# EAGLE board RFID_MQTT_FINAL_ULTIMO_ULTIMO (EAGLE 7.6.0)
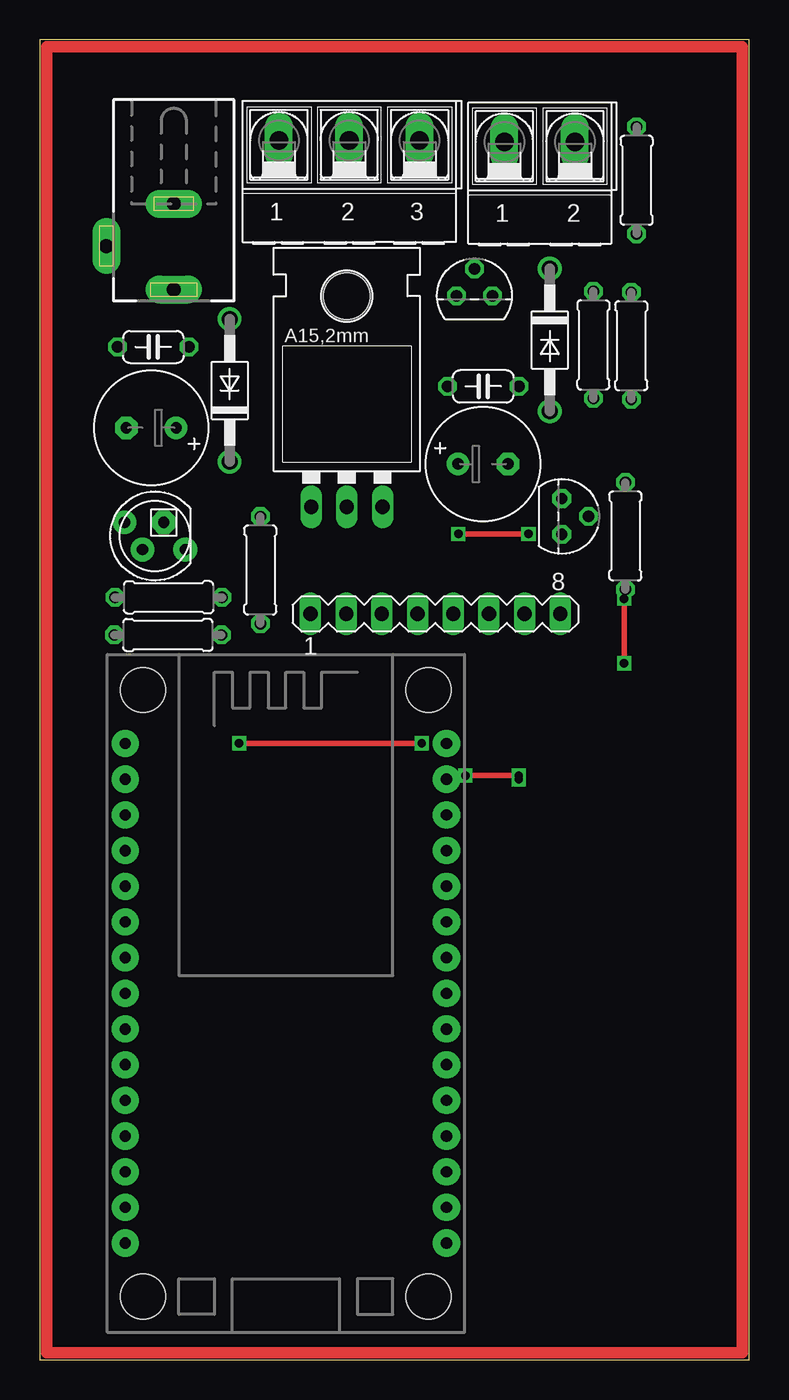
[diagram p0: board, top side]
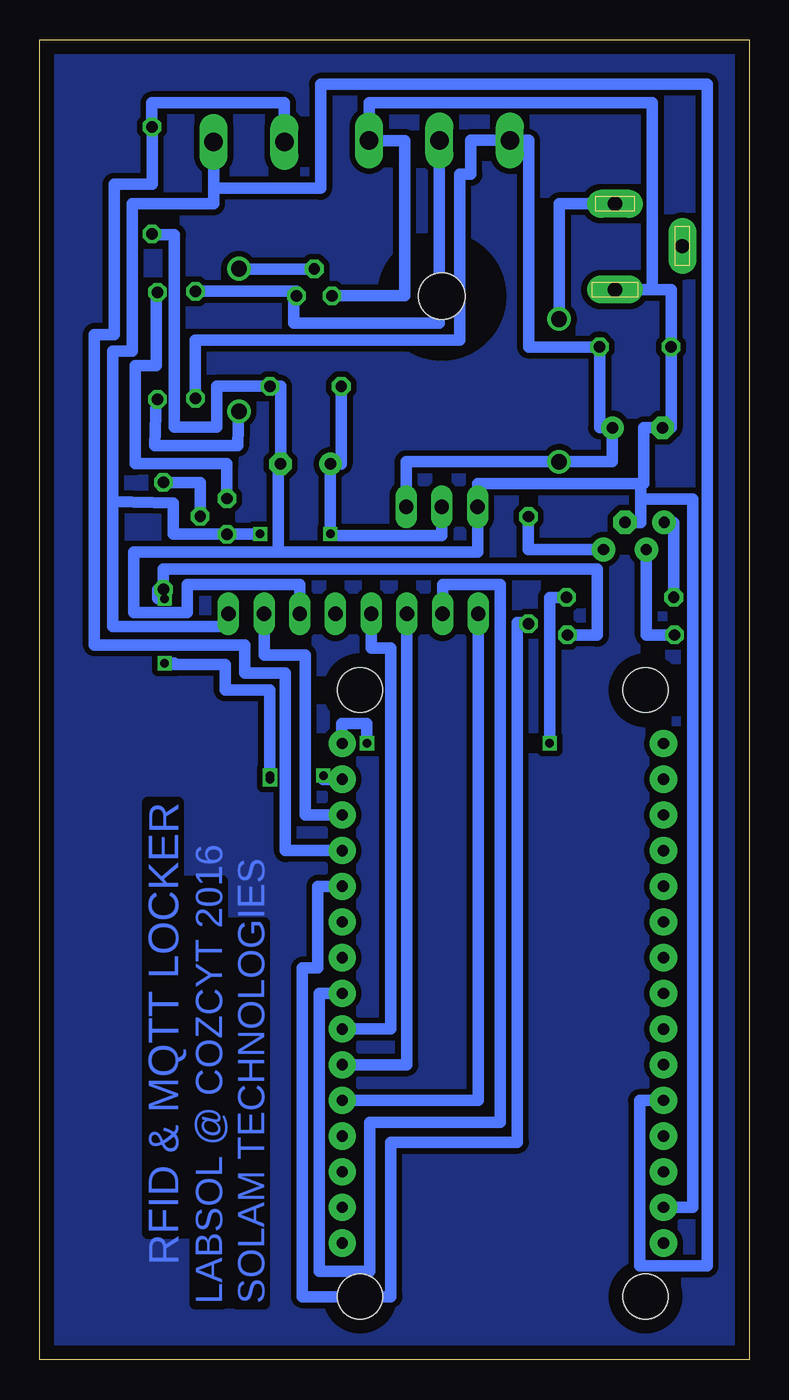
[diagram p1: board, bottom side, seen from below]

Size 50.5 x 94 mm. Coordinates in mm from the lower left corner, seen from the top.
Outline: 0,0 50.5,0 50.5,94 0,94 0,0
Copper layers (1*16): Top 0.035mm / dielectric 1.5mm / Bottom 0.035mm
Design rules "default": minimum track width 10mil, minimum drill 24mil, track to track 8mil, track to pad 8mil, pad to pad 8mil, via to via 8mil, smd to smd 8mil, copper to edge 40mil, drill to drill 8mil, minimum pad ring 10mil, minimum via ring 8mil, stop-mask expansion 4mil, vias tented up to drill 0mil, thermal gap 10mil

## Footprints (pad centres in the part's own frame; a part is rotated, then mirrored left to right if it is on the bottom)
C050-024X044 = drill 0.813 octagon: 1 -2.54,0; 2 2.54,0
E3,5-8 = drill 0.813 pad 1.6: + -1.778,0 | drill 0.813 pad 1.6 octagon: - 1.778,0
DO41-10 = drill 1.118: A 5.08,0; C -5.08,0
DCJ0202 = drill 1 pad 2 long: 1 0,3.1; 2 4.8,0; 3 0,-3
LED5MMRGB = drill 0.8 pad 1.676: 1 -2.159,0.968; 3 0.889,0.968; 4 2.159,-0.968 | drill 0.8 pad 1.676 octagon: 2 -0.635,-0.968
0207/7 = drill 0.813 octagon: 1 -3.81,0; 2 3.81,0
MA08-1 = drill 1.016 long: 1 -8.89,0; 2 -6.35,0; 3 -3.81,0; 4 -1.27,0; 5 1.27,0; 6 3.81,0; 7 6.35,0; 8 8.89,0
TO92 = drill 0.813 octagon: 1 1.27,0; 2 0,1.905; 3 -1.27,0
LD1117V33 = drill 1.016 long: GND -2.54,-8.89; IN 2.54,-8.89; OUT 0,-8.89 | hole 3.302: 0,6.096
ESP12E_DEVKIT = drill 0.8 pad 1.93: 3V3@0 -11.43,-7.62; 3V3@1 11.43,5.08; 3V3@2 11.43,-17.78; AD0 -11.43,17.78; CLK -11.43,-2.54; CMD -11.43,2.54; D0 11.43,17.78; D1 11.43,15.24; D2 11.43,12.7; D3 11.43,10.16; D4 11.43,7.62; D5 11.43,0; D6 11.43,-2.54; D7 11.43,-5.08; D8 11.43,-7.62; EN -11.43,-10.16; GND@0 -11.43,-5.08; GND@1 -11.43,-15.24; GND@2 11.43,2.54; GND@3 11.43,-15.24; RST -11.43,-12.7; RSV@0 -11.43,15.24; RSV@1 -11.43,12.7; RX 11.43,-10.16; SD0 -11.43,0; SD1 -11.43,5.08; SD2 -11.43,7.62; SD3 -11.43,10.16; TX 11.43,-12.7; VIN -11.43,-17.78 | hole 3.2: -10.16,21.59; 10.16,21.59; 10.16,-21.59; -10.16,-21.59
AK500/2-H = drill 1.321 long: 1 -2.515,0; 2 2.515,0
AK500/3-H = drill 1.321 long: 1 -5.004,0; 2 0,0; 3 5.004,0

## Placement (x,y rotation side)
C1  100 nF  [C050-024X044]  8.1,72.11 180 top
C2  100 uF  [E3,5-8]  7.95,66.36 180 top
C3  10 uF  [E3,5-8]  31.56,63.78 0 top
C4  100 nF  [C050-024X044]  31.57,69.31 0 top
D1  1N4004  [DO41-10]  13.53,69.02 90 top
D2  1N4004  [DO41-10]  36.31,72.61 270 top
J1  DCJ0202  [DCJ0202]  9.55,79.3 180 top
LED1  RGBLED_CA-5MM  [LED5MMRGB]  8.21,58.66 180 top
R1  100r  [0207/7]  15.71,56.23 90 top
R2  100r  [0207/7]  9.13,51.61 180 top
R3  100r  [0207/7]  9.18,54.29 180 top
R4  1k  [0207/7]  41.69,58.66 90 top
R5  1k  [0207/7]  42.11,72.2 270 top
R6  1k  [0207/7]  39.41,72.26 270 top
R7  10k  [0207/7]  42.49,83.98 90 top
SV1  [MA08-1]  28.17,53.11 0 top
T1  2N3904  [TO92]  37.16,60.05 270 top
T2  2N3904  [TO92]  30.95,75.76 0 top
U$1  LD33V  [LD1117V33]  21.87,69.63 0 top
U$2  ESP12E_DEVKIT  [ESP12E_DEVKIT]  17.53,26.1 0 top
X1  [AK500/2-H]  35.59,86.72 0 top
X2  [AK500/3-H]  22.04,86.82 0 top

## Library data of the parts
C1 C4 R1-R7 = rcl
C2 C3 = resistor
D1 D2 = diode
J1 = con-jack; OC_FARNELL: unknown; OC_NEWARK: unknown
LED1 = adafruit
SV1 = con-lstb; OC_FARNELL: unknown; OC_NEWARK: unknown
T1 T2 = transistor-neu-to92
U$1 = LD1117V33
U$2 = NODEMCU
X1 X2 = con-ptr500; OC_FARNELL: unknown; OC_NEWARK: unknown

## Nets
N$1: D1.A J1.3
N$2: C1.1 C2.+ D1.C R6.2 U$1.IN X2.1
N$3: R4.2 T1.2
N$4: C3.+ C4.1 SV1.8 T1.1 U$1.OUT U$2.3V3@0 X1.2
N$5: SV1.7 U$2.D2
N$6: SV1.1 U$2.D8
N$7: SV1.2 U$2.D5
N$8: SV1.3 U$2.D7
N$9: SV1.4 U$2.D6
N$10: LED1.4 R3.2
N$11: C1.2 C2.- C3.- C4.2 J1.1 LED1.2 R7.1 SV1.6 T2.3 U$1.GND U$2.GND@1 X2.3
N$12: LED1.1 R1.2
N$13: R3.1 U$2.D0
N$14: R2.1 R4.1 U$2.D1
N$15: R1.1 U$2.D4
N$16: R5.1 T1.3
N$17: D2.A R5.2
N$18: D2.C T2.2
N$19: R6.1 T2.1 X2.2
N$20: LED1.3 R2.2
N$21: R7.2 U$2.D3 X1.1

## Tracks (layer width: path | path; a pad name or v marks a point on that pad's centre or on a via)
GND
  pour Bottom (isolate 0.406, no thermals): 0.5,93.5 50,93.5 50,0.5 0.5,0.5
N$1
  Bottom 0.813: J1.3 13.53,82.3 D1.A
N$2
  Bottom 0.813: C1.1 10.64,72.4 | C1.1 10.64,66.36 C2.+ 9.73,63.94 D1.C 24.41,63.94 U$1.IN | C1.1 15.7,72.11 15.7,86.82 X2.1 19.8,86.82 19.8,84.4 20.6,84.4 20.6,72.6 39.41,72.6 R6.2
N$3
  Bottom 0.813: T1.2 39.06,62.47 R4.2
N$4  (via drill 0.6)
  Top 0.406: v34.8,58.8 v29.8,58.8
  Bottom 0.813: U$1.OUT 21.87,58.7 29.8,58.7 v29.8,58.8 29.8,63.78 C3.+ 29.03,63.78 C4.1 | 45.3,61.1 41,61 41,58.78 T1.1 34.8,58.78 v34.8,58.8 | 45.3,61.1 45.3,71.8 43.9,71.8 43.9,82.3 38.1,82.3 38.1,83.4 | 38.1,83.4 X1.2 | 45.3,61.1 45.3,52.2 37.1,52.2 37.1,53.11 SV1.8 | U$2.3V3@0 7.8,18.48 7.8,6.7 3,6.7 3,90.8 30.5,90.8 30.5,83.4 38.1,83.4
N$5
  Bottom 0.813: U$2.D2 31.6,38.8 31.6,50.2 34.52,50.2 SV1.7
N$6
  Bottom 0.813: U$2.D8 19.28,18.48 SV1.1
N$7
  Bottom 0.813: SV1.2 21.82,55.2 17.7,55.2 17.7,16.9 27,16.9 27,6.3 30.6,6.3 30.6,26.1 U$2.D5
N$8
  Bottom 0.813: U$2.D7 24.36,21.02 SV1.3
N$9
  Bottom 0.813: U$2.D6 25.5,23.56 25.5,50.7 26.9,50.7 SV1.4
N$10
  Bottom 0.813: R3.2 5.37,59.63 LED1.4
N$11
  Bottom 0.813: 6.9,76.2 6.9,89.5 27.04,89.5 X2.3 27.04,86.8 24.5,86.8 24.5,75.76 T2.3 | 6.9,76.2 J1.1 | 6.9,76.2 5.56,76.2 C1.2 5.56,66.36 C2.- 7.5,66.36 7.5,62.4 7.7,62.4 | 7.7,62.4 19.33,62.4 U$1.GND 19.33,57.5 33.5,57.5 | 33.5,57.5 33.5,63.78 C3.- 33.34,69.31 C4.2 37.9,69.31 37.9,66.4 40.9,66.4 40.9,80.1 42.49,80.1 R7.1 | LED1.2 7.7,59.63 7.7,61.3 | 7.7,61.3 7.7,62.4 | U$2.GND@1 4,10.86 4,61.3 7.7,61.3 | SV1.6 31.98,55.2 40,55.2 40,53.2 43.8,53.2 43.8,57.5 33.5,57.5
N$12
  Bottom 0.813: LED1.1 15.71,57.69 R1.2
N$13  (via drill 0.6)
  Top 0.406: v14.2,43.9 v27.2,43.9
  Bottom 0.813: R3.1 14.2,54.29 v14.2,43.9 | v27.2,43.9 27.2,45.3 29,45.3 29,43.88 U$2.D0
N$14  (via drill 0.6)
  Top 0.406: v30.3,41.6 v34.1,41.6 | v41.6,54.2 v41.6,49.6
  Bottom 0.813: R2.1 10.8,51.6 10.8,56.3 41.69,56.3 R4.1 42.1,54.85 42.1,54.2 v41.6,54.2 | U$2.D1 30.3,41.34 v30.3,41.6 | v34.1,41.34 v34.1,41.6 34.1,47.7 37.3,47.7 37.3,49.5 40.9,49.5 40.9,49.6 v41.6,49.6
N$15
  Bottom 0.813: U$2.D4 30.7,33.72 30.7,27.9 31.8,27.9 31.8,4.5 25.5,4.5 25.5,15.5 16.5,15.5 16.5,52.5 15.71,52.5 R1.1
N$16
  Bottom 0.813: T1.3 37.16,63.8 43.7,63.8 43.7,70.8 42.2,70.8 42.2,76.01 R5.1
N$17
  Bottom 0.813: D2.A 36.41,65.1 42.3,65.1 42.2,68.39 R5.2
N$18
  Bottom 0.813: T2.2 36.31,77.67 D2.C
N$19
  Bottom 0.813: X2.2 22.04,73.8 32.4,73.8 32.4,75.76 T2.1 32.22,76.07 R6.1
N$20
  Bottom 0.813: R2.2 7.32,51.61 LED1.3
N$21
  Bottom 0.813: X1.1 33.08,89.5 42.5,89.5 R7.2 42.49,83.7 45.2,83.7 45.2,73 46.6,73 46.6,50.9 35.9,50.9 35.9,48.9 33,48.9 33,36.26 U$2.D3
N$22
  Top 0.813: 0.5,93.5 50,93.5 50,0.5 0.5,0.5 0.5,93.5

## Text on the board
Bottom: RFID & MQTT LOCKER | SOLAM TECHNOLOGIES | LABSOL @ COZCYT 2016